# Altium PCB Robot Control Board - save.PcbDoc (part 2 of 2)
Units mm, origin at the board's own origin, x right, y up, seen from the top; angles counter-clockwise.
Board outline 113.92 x 101.47 mm, 4 copper layers (Component Side, GND, VCC, Solder Side), stack 1.6 mm thick; 77 components, 60 nets, 315 pads, 76 vias.
Unrouted connection lines stored in the file: 4.
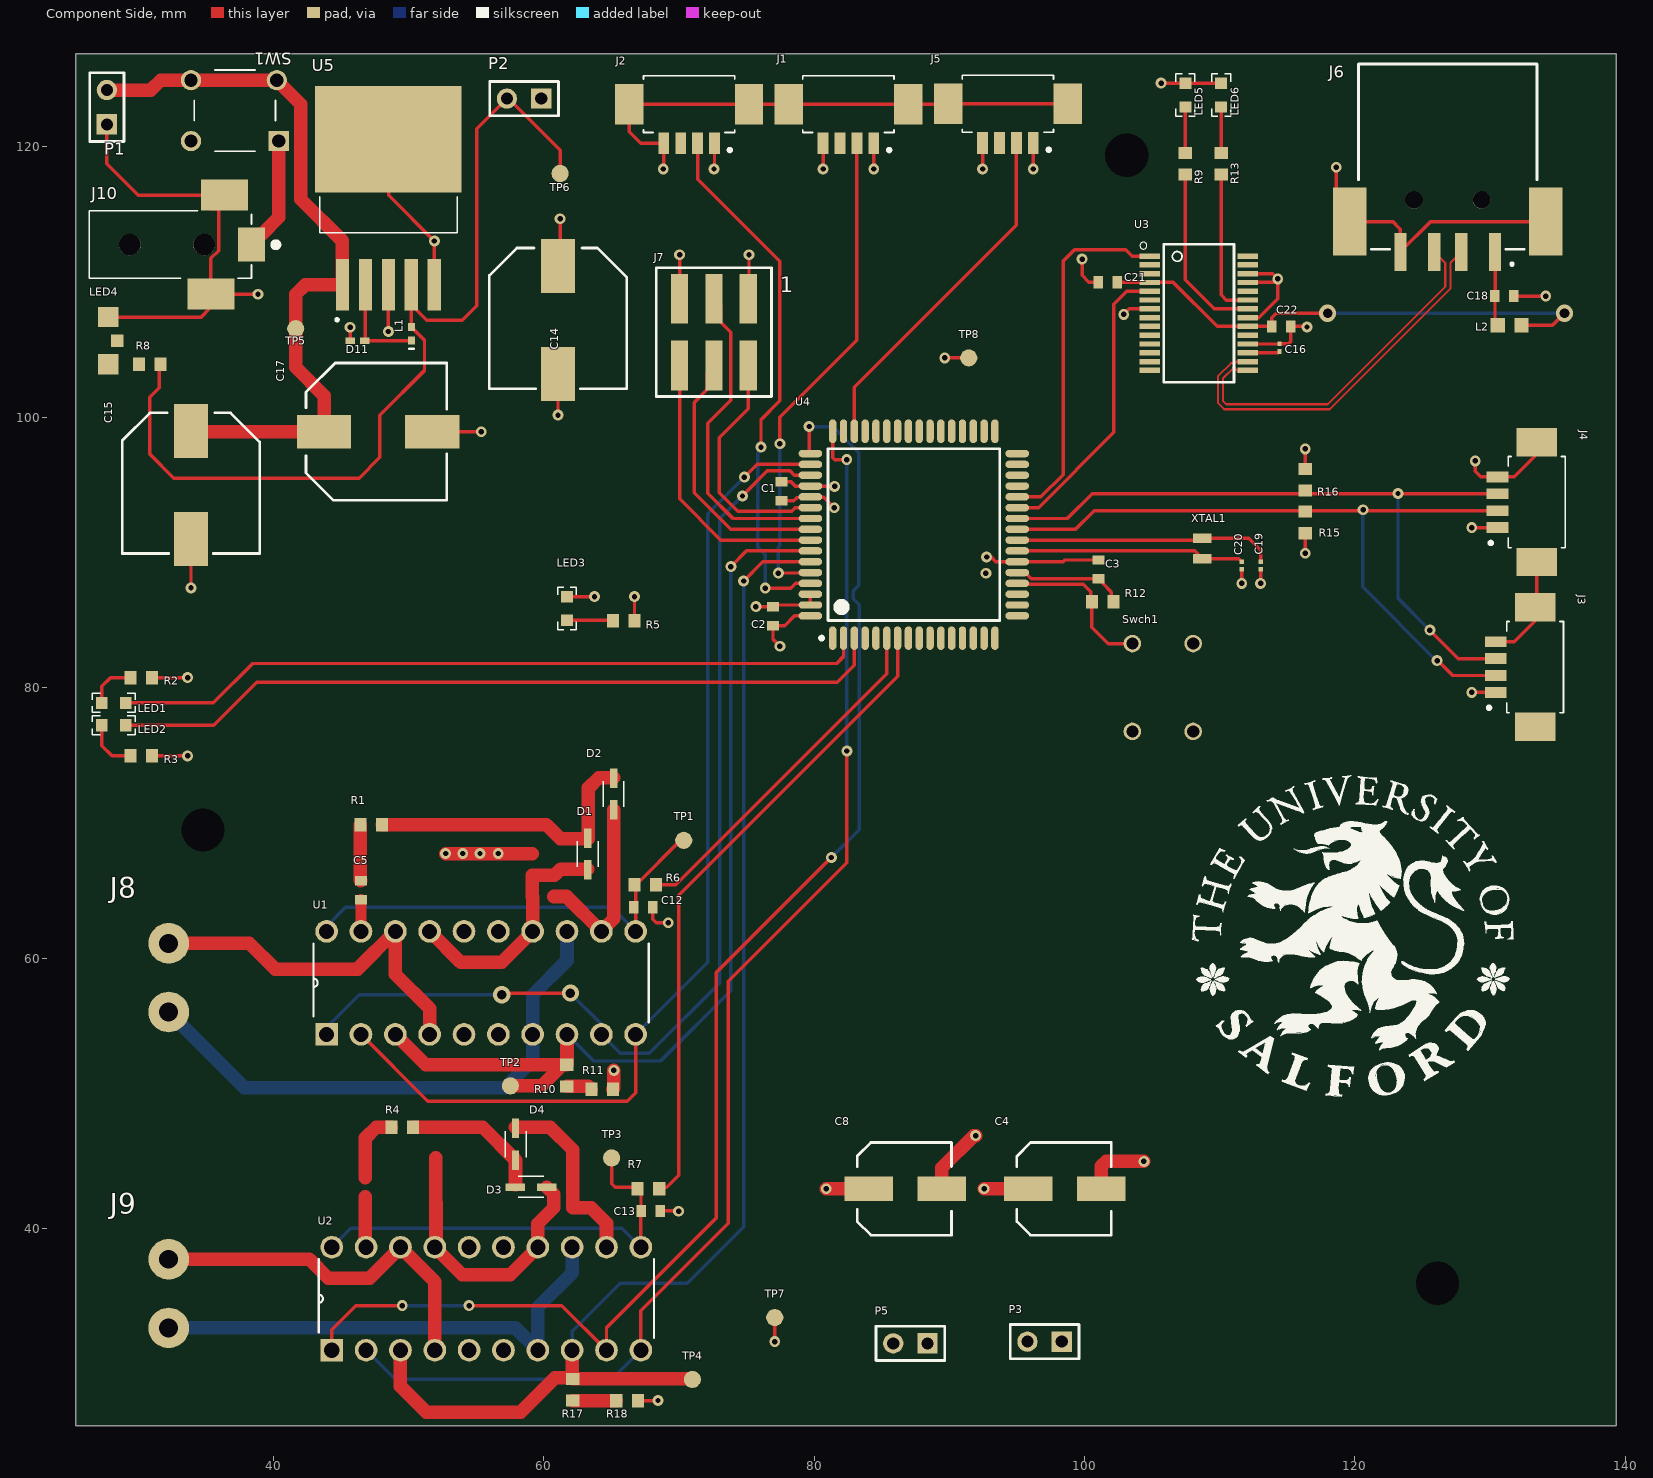
[diagram p0: Component Side view]

## Via types
v1: diameter 0.8, hole 0.4, Component Side to Solder Side, 72 vias
v2: diameter 1.27, hole 0.711, Component Side to Solder Side, 4 vias

## Nets (pads, with @x,y where several pads share a name; then routed paths per layer and width w, separated by ;. In a path a pad name is that pad's centre, name@x,y a point inside that pad or via, vN(x,y) a via of type N, cw(c..) or ccw(c..) an arc to the next point about the centre after c; other vN are vias at no path point) (continued)
NetU1_1: (continued)
  Component Side w0.254: v2(56.896,57.277) 57.023,57.404 v2(61.976,57.404) ; v1(74.705,94.174) 74.705,94.204 76.537,96.036 78.217,96.036 78.539,95.713 U4.51
  Solder Side w0.254: U1.1 43.942,54.864 46.355,57.277 v2(56.896,57.277) ; v2(61.976,57.404) 64.262,55.118 U1.9 65.659,52.959 67.818,52.959 73.01,58.151 73.01,92.509 74.675,94.174 v1(74.705,94.174)
NetU1_2: U1.2 U1.10 U4.50 | length 76.8
  Component Side w0.254: U1.2 51.435,49.403 66.167,49.403 66.802,50.038 U1.10 ; v1(74.847,95.57) 75.79,96.513 U4.50
  Solder Side w0.254: U1.10 72.136,59.69 72.136,92.859 v1(74.847,95.57)
NetU2_1: U2.1 U2.9 U4.49 | length 105
  Component Side w0.254: U2.1 44.323,32.512 46.101,34.29 v1(49.53,34.29) ; v1(54.483,34.29) 61.341,34.29 U2.9 64.643,32.639 72.771,40.767 72.771,58.928 v1(81.28,67.437) ; v1(79.629,99.314) 79.629,97.41 U4.49
  Solder Side w0.254: v1(49.53,34.29) v1(54.483,34.29) ; v1(79.629,99.314) 81.386,99.314 83.312,97.388 83.312,87.571 82.889,87.148 82.889,86.588 83.335,86.142 83.335,69.492 v1(81.28,67.437)
NetU2_2: U2.2 U2.10 U4.48 | length 97.4
  Component Side w0.254: U2.10 67.183,33.909 73.66,40.386 73.66,58.293 82.423,67.056 v1(82.423,75.311) ; U4.48 81.376,97.017 81.525,96.869 v1(82.415,96.869)
  Solder Side w0.254: U2.2 49.022,28.829 65.024,28.829 U2.10 ; v1(82.415,96.869) 82.415,75.319 v1(82.423,75.311)
NetU3_1: U3.1 U4.28 | length 26.8
  Component Side w0.254: U4.28 96.78,94.113 98.425,95.758 98.425,111.558 99.262,112.395 103.053,112.395 103.527,111.921 U3.1
NetU3_5: U3.5 U4.27 | length 22.1
  Component Side w0.254: U4.27 96.615,93.313 102.178,98.876 102.178,108.357 103.142,109.321 U3.5 U3.5@104.953,109.321
PWM_S: J5.2 U4.46 | length 26.3
  Component Side w0.254: U4.46 82.976,102.221 94.966,114.211 J5.2
RESET: R12.1 Swch1.1 U4.20 | length 11.8
  Component Side w0.254: U4.20 95.083,87.656 95.892,87.656 95.909,87.639 99.896,87.639 100.457,87.078 R12.1@100.457,86.344 ; R12.1 100.546,84.467 101.753,83.26 Swch1.1
SCL: J3.2 J4.2 R15.1 U4.25 | length 54.4
  Component Side w0.254: U4.25 99.333,91.713 100.711,93.091 120.543,93.091 v1(120.611,93.158) 120.678,93.091 J4.2 ; v1(126.086,82.002) 126.151,82.002 127.254,80.899 J3.2
  Solder Side w0.254: v1(120.611,93.158) 120.575,93.123 120.575,87.451 126.024,82.002 v1(126.086,82.002)
SDA: J3.3 J4.3 R16.1 U4.26 | length 53.1
  Component Side w0.254: U4.26 98.736,92.513 100.564,94.341 116.332,94.341 123.19,94.341 J4.3 ; v1(125.551,84.253) 127.655,82.149 J3.3
  Solder Side w0.254: v1(123.19,94.361) 123.19,86.614 v1(125.551,84.253)
TCK: J7.6 U4.57 | length 20.8
  Component Side w0.254: J7.6 70.054,93.961 73.102,90.913 U4.57
TDI: J7.2 U4.54 | length 17.7
  Component Side w0.254: J7.2 75.134,100.616 72.998,98.48 72.998,94.401 74.347,93.052 78.36,93.052 78.621,93.313 U4.54
TDO: J7.3 U4.55 | length 24
  Component Side w0.254: J7.3 73.102,108.267 73.102,107.041 73.844,106.299 73.844,101.25 72.136,99.542 72.136,94.376 73.999,92.513 U4.55
TMS: J7.4 U4.56 | length 19.7
  Component Side w0.254: J7.4 72.086,103.315 72.086,102.058 71.12,101.092 71.12,94.414 73.821,91.713 U4.56
USB_N: J6.02 U3.16 | length 28.8
  Component Side w0.154: U3.16 111.256,104.121 111.141,104.006 110.843,104.006 109.862,103.025 109.862,101.064 110.335,100.591 118.138,100.591 127.06,109.513 127.06,111.415 J6.02
USB_P: J6.03 U3.15 | length 27
  Component Side w0.154: U3.15 111.256,103.471 111.256,103.501 111.125,103.632 110.998,103.632 110.236,102.87 110.236,101.219 110.49,100.965 117.983,100.965 126.686,109.668 126.686,111.415 J6.03
VENInA: C12.2 R6.1 TP1.1 U1.11 U1.20 | length 33
  Component Side w0.254: U1.11 66.814,61.988 66.814,65.276 R6.1@66.943,65.405 ; R6.1@66.814,65.405 66.879,65.47 70.116,68.707 TP1.1
  Solder Side w0.254: U1.20 43.942,62.357 45.339,63.754 65.024,63.754 U1.11
VENInB: C13.2 R7.1 TP3.1 U2.11 U2.20 | length 32.8
  Component Side w0.254: TP3.1 65.024,43.307 65.278,43.053 67.195,43.053 67.195,41.287 67.183,41.275 U2.11 U2.11@67.056,38.735
  Solder Side w0.254: U2.20 45.72,40.005 65.786,40.005 U2.11
VUSB: C21.2 C22.2 L2.1 U3.4 U3.20 | length 38.8
  Component Side w0.254: C21.2 104.822,109.982 U3.4 106.564,109.971 109.814,106.721 U3.20 C22.2 113.854,107.371 114.179,107.696 v2(117.983,107.696) ; L2.1 134.62,106.807 v2(135.509,107.696)
  Solder Side w0.254: v2(117.983,107.696) v2(135.509,107.696)
pads on no net: J1.3 J2.3 J5.3 J6. J10. LED4.3 SW1.2 Swch1.2 U3.2 U3.3 U3.6 U3.8 U3.9 U3.10 U3.11 U3.12 U3.13 U3.14 U3.19 U3.24 U3.27 U3.28 U4.1 U4.4 U4.5 U4.8 U4.9 U4.10 U4.11 U4.12 U4.13 U4.14 U4.15 U4.16 U4.17 U4.18 U4.19 U4.29 U4.30 U4.31 U4.32 U4.33 U4.34 U4.35 U4.36 U4.37 U4.38 U4.39 U4.40 U4.41 U4.42 U4.43 U4.44 U4.45 U4.47

## Polygon pours and split planes (outlines as drawn)
+5V on VCC "VCC-VCC" (solid, pour order 2): 29.21,128.27 24.257,123.317 24.257,81.026 29.591,75.692 133.858,75.692 142.113,83.947 142.113,118.491 132.334,128.27
NetC8_1 on VCC "VCC-NetC8_1" (solid, pour order 4): 24.281,45.894 27.644,49.403 90.611,49.403 92.075,48.26 92.075,26.543 91.275,25.743 26.145,25.654 25.273,26.67
NetC4_1 on VCC "VCC-NetC4_1" (solid, pour order 6): 107.124,24.956 94.805,24.193 92.466,26.531 92.466,48.678 91.059,49.784 27.686,49.784 23.749,53.721 25.781,72.644 28.194,74.549 93.599,74.549 110.744,57.404 110.744,28.575
GND on GND "GND-GND" (solid, pour order 0): 25.4,124.714 27.559,126.873 136.906,126.873 139.319,124.46 139.319,31.623 133.096,25.4 31.242,25.4 25.4,31.242

## Silkscreen, mask and mechanical layers (free items; w line width, h text height)
Top Overlay:
  drawing of 4482 lines, arcs and shapes, not listed
BOARD:
  the board outline again, w0.254

## Text inside footprints (layer, text, board x,y; h text height)
C4: Mechanical 16 "-" at 104.377,42.226 h3; Mechanical 16 "+" at 93.345,42.037 h3
C8: Mechanical 16 "-" at 92.566,42.226 h3; Mechanical 16 "+" at 81.534,42.037 h3
C14: Mechanical 16 "-" at 60.356,101.363 h3 r270; Mechanical 16 "+" at 60.156,114.313 h3 r270
C15: Mechanical 16 "-" at 33.209,89.171 h3 r270; Mechanical 16 "+" at 33.009,102.121 h3 r270
C17: Mechanical 16 "-" at 53.577,98.233 h3; Mechanical 16 "+" at 40.627,98.033 h3
D1: Mechanical 16 "A" at 62.896,66.591 h1 r270; Mechanical 16 "K" at 62.946,69.516 h1 r270
D2: Mechanical 16 "A" at 65.537,73.236 h1 r90; Mechanical 16 "K" at 65.487,70.311 h1 r90
D3: Mechanical 16 "A" at 60.155,42.703 h1; Mechanical 16 "K" at 57.23,42.753 h1
D4: Mechanical 16 "A" at 57.562,45.128 h1 r270; Mechanical 16 "K" at 57.612,48.053 h1 r270
J6: Mechanical 13 "PCB EDGE" at 130.373,125.578 h1.02 r180
J7: Top Overlay "1" at 77.47,108.825 h1.97
LED1: Mechanical 16 "A" at 29.969,78.467 h0.9; Mechanical 16 "K" at 25.944,78.592 h0.9
LED2: Mechanical 16 "A" at 29.969,76.817 h0.9; Mechanical 16 "K" at 25.944,76.942 h0.9
LED3: Mechanical 16 "A" at 62.122,87.659 h0.9 r90; Mechanical 16 "K" at 62.047,83.584 h0.9 r90
LED4: Mechanical 16 "A" at 28.104,103.366 h1 r90; Mechanical 16 "K" at 28.143,107.462 h1 r90
LED5: Mechanical 16 "A" at 107.865,125.55 h0.9 r90; Mechanical 16 "K" at 107.765,121.6 h0.9 r90
LED6: Mechanical 16 "A" at 110.509,125.55 h0.9 r90; Mechanical 16 "K" at 110.409,121.6 h0.9 r90